# Altium PCB PCB.PcbDoc (part 1 of 2)
Units mm, origin at the board's own origin, x right, y up, seen from the top; angles counter-clockwise.
Board outline 183.5 x 159 mm, 2 copper layers (Top Layer, Bottom Layer); 206 components, 135 nets, 566 pads, 103 vias.
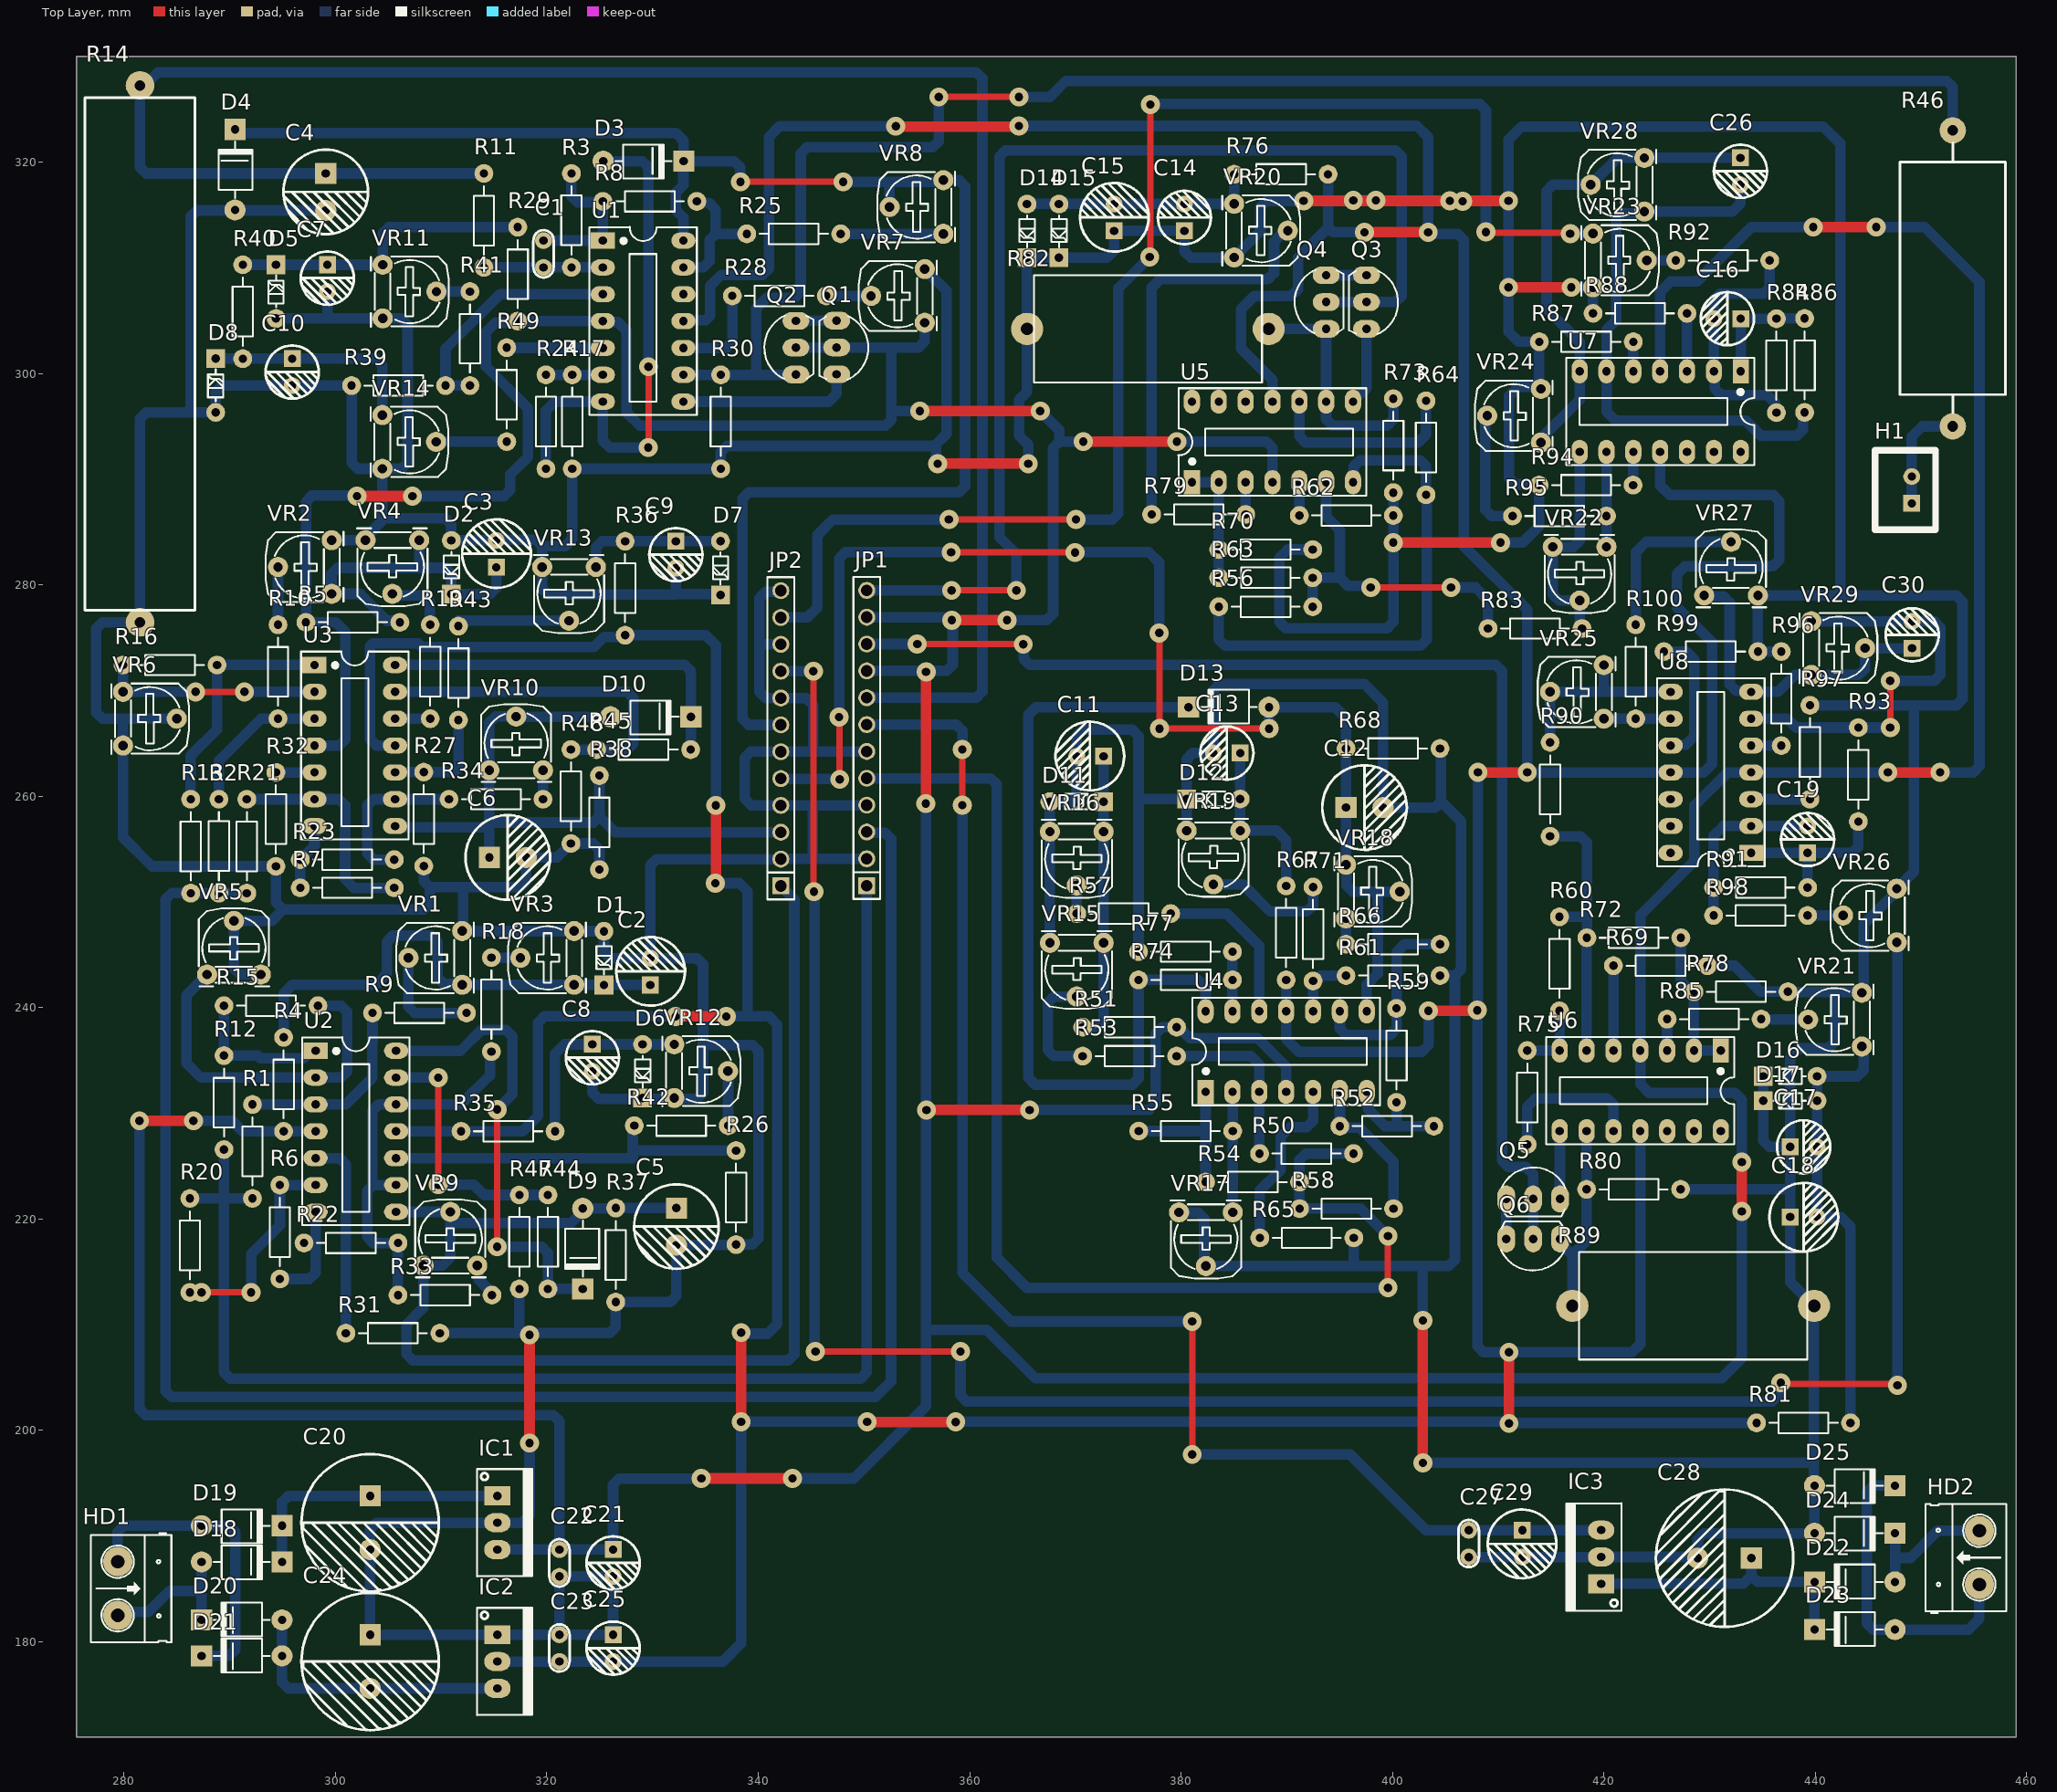
[diagram p0: Top Layer view]
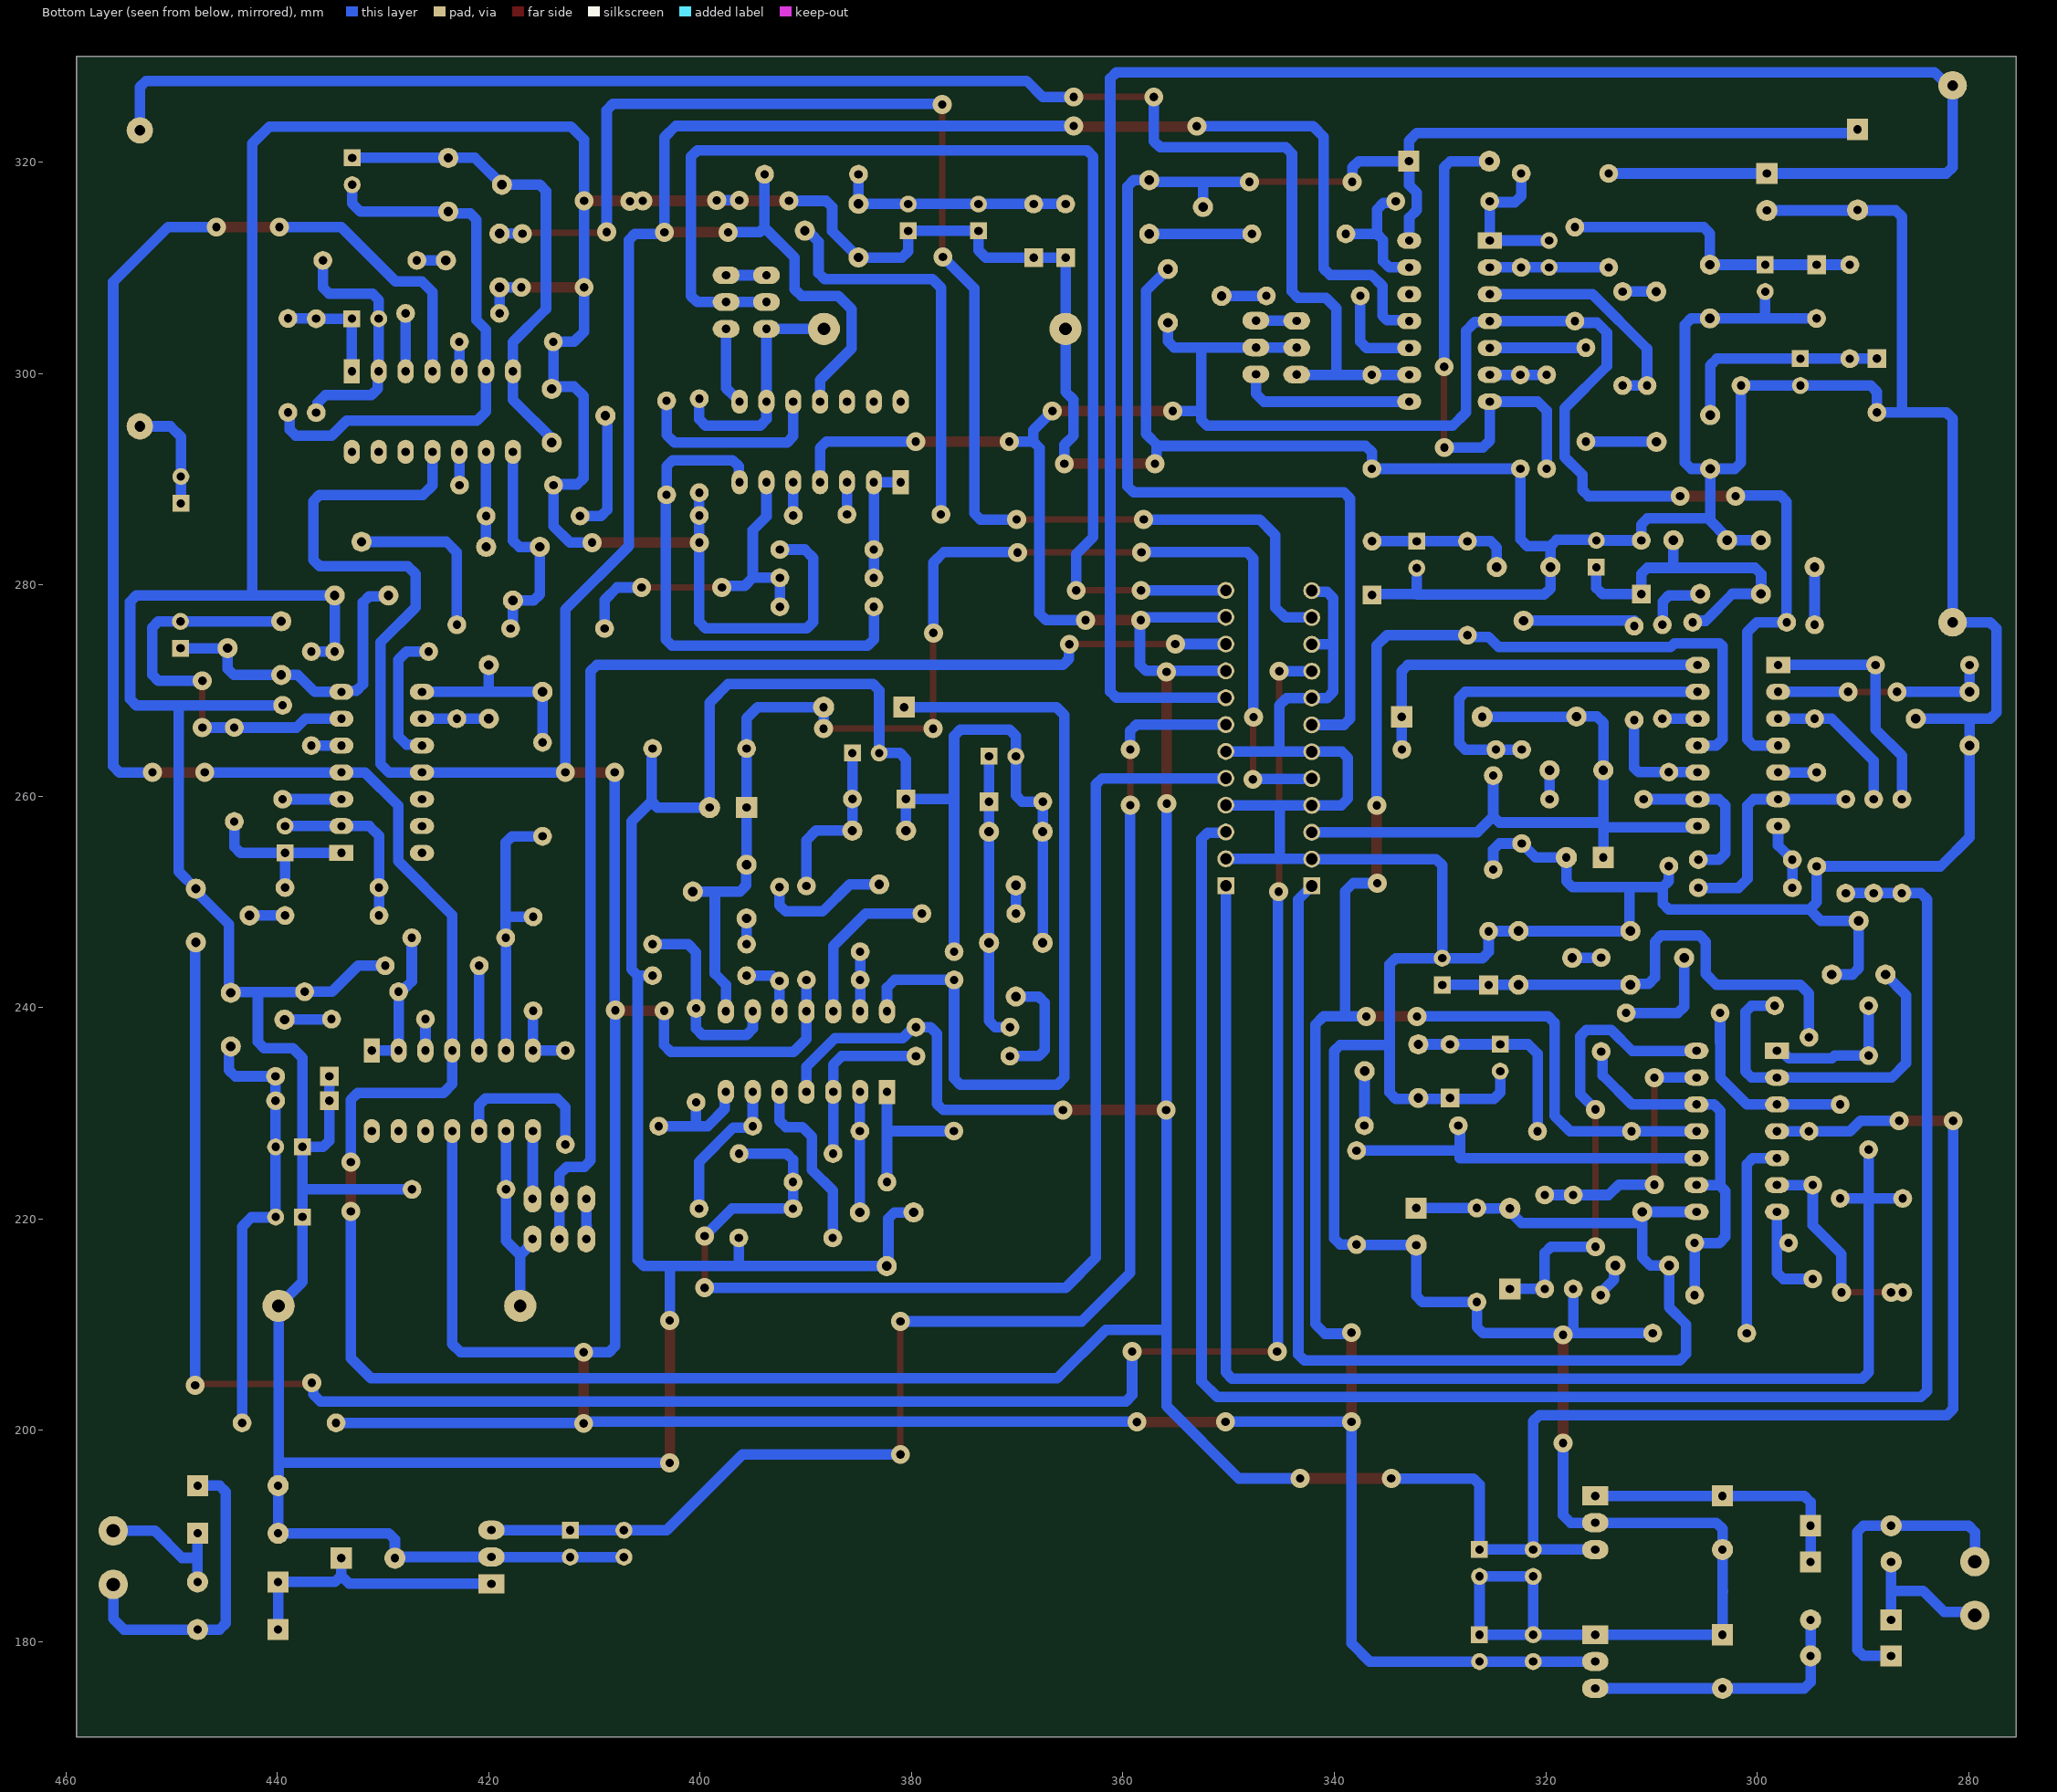
[diagram p1: Bottom Layer view, seen from below]
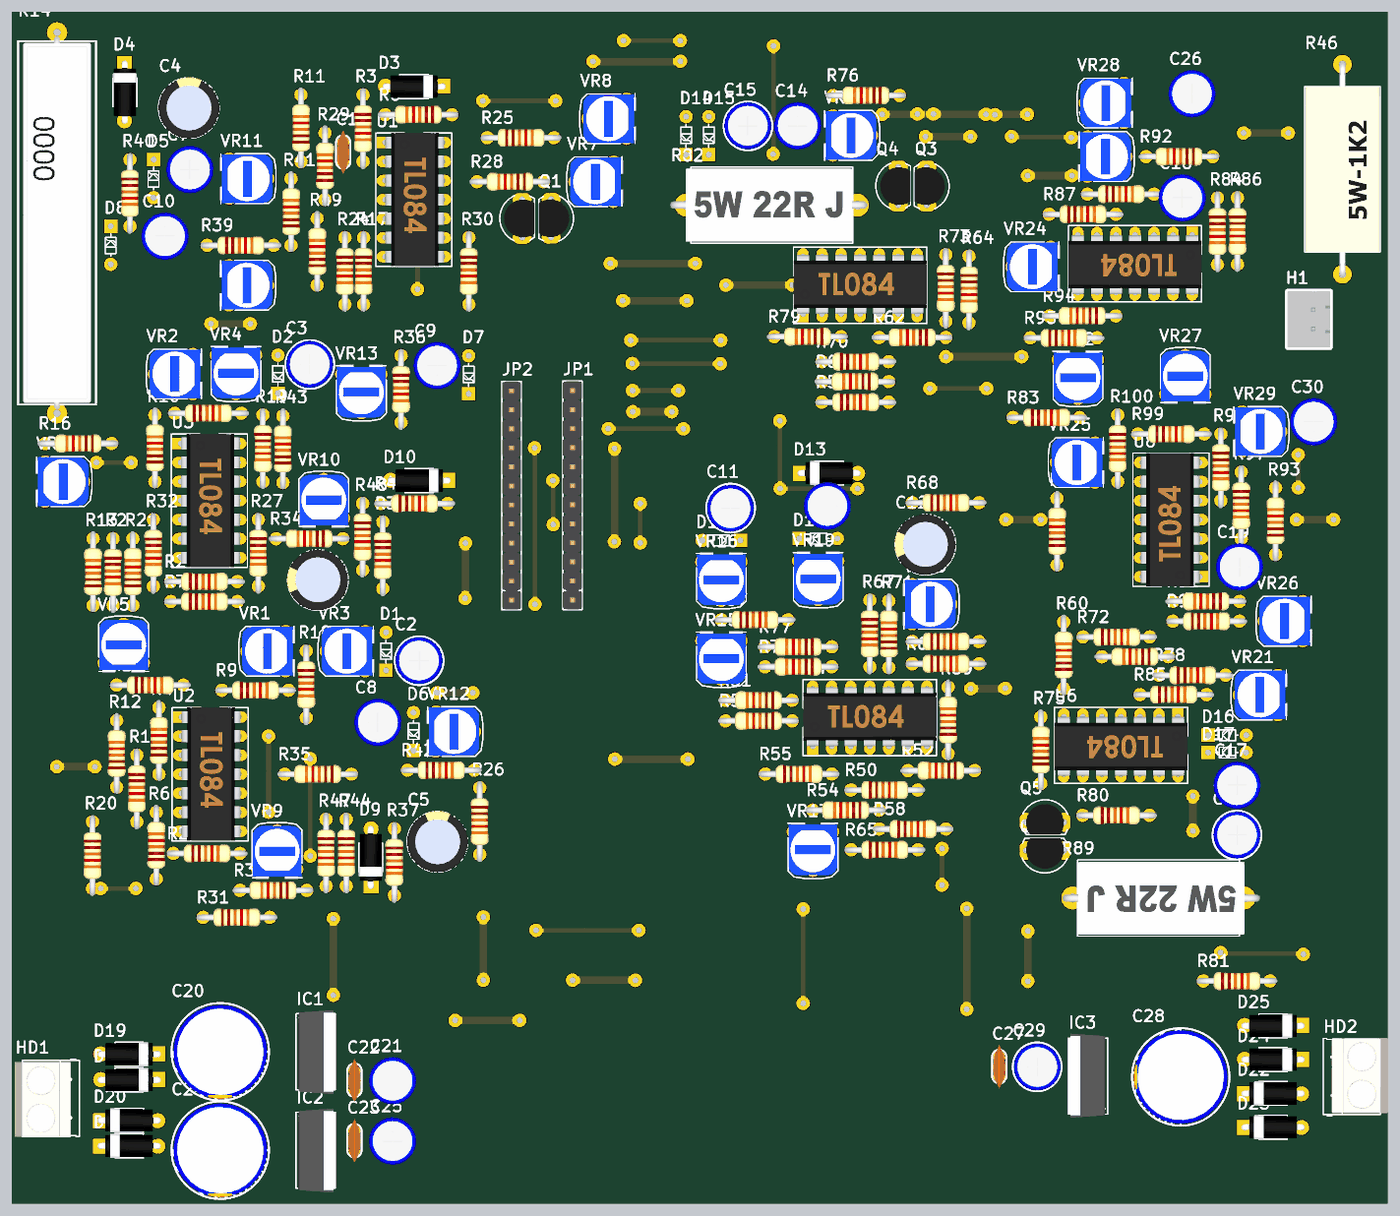
[diagram p3: 3D render of the assembled board from above, using the file's embedded part models]

## Layer stack, top to bottom
Top Solder: solder mask 0.0102, Solder Resist, Dk 3.5
Top Layer: signal copper 0.0356
Dielectric 1: dielectric 0.32, FR-4, Dk 4.8
Bottom Layer: signal copper 0.0356
Bottom Solder: solder mask 0.0102, Solder Resist, Dk 3.5

## Board outline
275.5,171 275.5,330 459,330 459,171

## Design rules (kind name [scope] priority, off if disabled: settings)
Clearance [All] p1: gap=0.6 ignorepadtopadclearanceinfootprint=FALSE
PolygonConnect [All] p1: connectstyle=Relief reliefconductorwidth=0.254 reliefentries=4 polygonreliefangle="90 Angle" airgapwidth=0.254
RoutingVias [All] p1: holewidth=0.711 width=1.27 viastyle="Through Hole" minholewidth=0.711 minwidth=1.27 maxholewidth=0.711 maxwidth=1.27
SolderMaskExpansion [All] p1: expansion=0.102 istentingtop=FALSE
Width GND [InNet('GND')] p1: maxlimit=1 minlimit=1 preferedwidth=1 minimp=50.000000 maximp=50.000000 favimp=50.000000
Width +12 [InNet('+12V')] p2: maxlimit=1 minlimit=1 preferedwidth=1 minimp=50.000000 maximp=50.000000 favimp=50.000000
Width -12 [InNet('-12V')] p3: maxlimit=1 minlimit=1 preferedwidth=1 minimp=50.000000 maximp=50.000000 favimp=50.000000
Width S [All] p4: maxlimit=1 minlimit=0.6 preferedwidth=0.8 toplayer_maxwidth=0.6 toplayer_prefwidth=0.6 minimp=50.000000 maximp=50.000000 favimp=50.000000
30 further rules are at their usual default settings.

## Components (designator, comment, footprint, x,y, rotation, side; value= is the part's Value field where it differs from the comment)
C1 "105" "tu gom" 319.685,311.301 r270 top
C2 "47uF/50V" "tu hoa 6.5mm" 329.82,243.433 r90 top
C3 "47uF/50V" "tu hoa 6.5mm" 315.24,282.955 r90 top
C4 "220uF/25V" "Tu hoa 8mm" 299.086,317.171 r270 top
C5 "100uF/50V" "tu hoa 8mm" 332.258,219.28 r270 top
C6 "100uF/50V" "tu hoa 8mm" 316.305,254.202 r0 top
C7 "100uF/25V" "tu hoa 5mm" 299.238,309.015 r270 top
C8 "100uF/25V" "tu hoa 5mm" 324.308,235.254 r270 top
C9 "100uF/25V" "tu hoa 5mm" 332.208,282.853 r270 top
C10 "47uF" "tu hoa 5mm" 295.911,300.125 r270 top
C11 "47uF/50V" "tu hoa 6.5mm" 371.374,263.803 r180 top
C12 "100uF/50V" "tu hoa 8mm" 397.356,258.927 r0 top
C13 "100uF/25V" "tu hoa 5mm" 384.328,264.083 r180 top
C14 "100uF/25V" "tu hoa 5mm" 380.315,314.756 r90 top
C15 "47uF/50V" "tu hoa 6.5mm" 373.686,314.781 r90 top
C16 "100uF/25V" "tu hoa 5mm" 431.674,305.18 r180 top
C17 "100uF/25V" "tu hoa 5mm" 438.888,226.819 r0 top
C18 "47uF/50V" "tu hoa 6.5mm" 438.913,220.165 r0 top
C19 "100uF/25V" "tu hoa 5mm" 439.269,255.902 r90 top
C20 "1000uF/25v" "tu hoa 13mm" 303.281,191.258 r270 top
C21 "100uF" "tu hoa 5mm" 326.268,187.448 r270 top
C22 "104" "tu gom" 321.188,187.448 r270 top
C23 "104" "tu gom" 321.188,179.397 r270 top
C24 "1000uF/25v" "tu hoa 13mm" 303.281,178.127 r270 top
C25 "100uF" "tu hoa 5mm" 326.268,179.397 r270 top
C26 "100uF/25V" "tu hoa 5mm" 432.919,319.125 r270 top
C27 "104" "tu gom" 407.208,189.282 r270 top
C28 "1000uF/35V" "tu hoa 13mm" 431.415,187.91 r180 top
C29 "100uF" "tu hoa 6.5mm" 412.263,189.256 r270 top
C30 "100uF/25V" "tu hoa 5mm" 449.162,275.27 r90 top
D1 "5V1" DZ0.5A 325.4,247.217 r90 top value=3v3
D2 "5V1" DZ0.5A 310.973,284.2 r90 top value=3v3
D3 "4007" "DIODE 1A" 324.058,320.085 r180 top
D4 "4007" "DIODE 1A" 290.501,314.197 r270 top
D5 "6V8" DZ0.5A 294.387,305.205 r270 top value=3v3
D6 "5V1" DZ0.5A 329.058,236.524 r90 top value=3v3
D7 "5V1" DZ0.5A 336.424,284.123 r90 top value=3v3
D8 "2V3" DZ0.5A 288.672,296.315 r270 top value=3v3
D9 "4007" "DIODE 1A" 323.398,222.269 r90 top
D10 "4007" "DIODE 1A" 324.74,267.512 r180 top
D11 "5V1" DZ0.5A 367.59,259.485 r180 top value=3v3
D12 "5V1" DZ0.5A 385.598,259.739 r0 top value=3v3
D13 "4007" "DIODE 1A" 389.586,268.426 r0 top
D14 "6V8" DZ0.5A 365.431,316.026 r90 top value=3v3
D15 "2V3" DZ0.5A 368.453,316.026 r90 top value=3v3
D16 "6V8" DZ0.5A 440.158,233.5 r0 top value=3v3
D17 "2V3" DZ0.5A 440.158,231.188 r0 top value=3v3
D18 "4007" "DIODE 1A" 286.059,187.55 r180 top
D19 "4007" "DIODE 1A" 286.059,190.979 r180 top
D20 "4007" "DIODE 1A" 296.219,182.064 r0 top
D21 "4007" "DIODE 1A" 296.219,178.66 r0 top
D22 "4007" "DIODE 1A" 448.814,185.658 r0 top
D23 "4007" "DIODE 1A" 448.814,181.154 r0 top
D24 "4007" "DIODE 1A" 438.654,190.264 r180 top
D25 "4007" "DIODE 1A" 438.654,194.768 r180 top
H1 "Header 2P 2.54 Duc Thang" XH2.54M-2 449.124,287.705 r90 top
HD1 "Header 2" HED2 279.405,187.575 r270 top
HD2 "Header 2" HED2 455.519,185.421 r90 top
IC1 "LM7812" QTO-220 315.32,193.798 r270 top value=LM7805
IC2 "LM7912" QTO-220 315.32,180.667 r270 top value=LM7905
IC3 "LM7824" QTO-220 419.743,185.484 r90 top value=LM7805
JP1 "Noi TB1" JP12-D1T 350.267,251.535 r90 top
JP2 "Noi VXL1" JP12-D1T 342.139,251.51 r90 top
Q1 "C1815" QTO-92 347.422,302.462 r270 top
Q2 "C2335" QTO-92 343.561,302.437 r90 top value=C1815
Q3 "C1815" QTO-92 397.536,306.755 r270 top
Q4 "C2323" QTO-92 393.726,306.755 r90 top value=C1815
Q5 "C1815" QTO-92 413.31,221.893 r0 top
Q6 "C2323" QTO-92 413.31,218.109 r180 top value=C1815
R1 "10.17K" R1/4W 292.152,221.944 r90 top value="R1/4W - 1K"
R2 "10.17K" R1/4W 288.977,250.824 r90 top value="R1/4W - 1K"
R3 "22k" R1/4W 322.327,310.031 r90 top value="R1/4W - 1K"
R4 "680" R1/4W 295.098,237.184 r270 top value="R1/4W - 1K"
R5 "680" R1/4W 306.096,276.453 r180 top value="R1/4W - 1K"
R6 "100K" R1/4W 294.743,223.214 r270 top value="R1/4W - 1K"
R7 "100K" R1/4W 305.563,251.332 r180 top value="R1/4W - 1K"
R8 "4.7k" R1/4W 325.299,316.28 r0 top value="R1/4W - 1K"
R9 "10.17K" R1/4W 312.396,239.496 r180 top value="R1/4W - 1K"
R10 "10.17K" R1/4W 294.565,276.224 r270 top value="R1/4W - 1K"
R11 "22k" R1/4W 314.047,318.921 r270 top value="R1/4W - 1K"
R12 "2k7" R1/4W 289.459,235.457 r270 top value="R1/4W - 1K"
R13 "2k7" R1/4W 286.31,259.714 r270 top value="R1/4W - 1K"
R14 "68" "Tro cong suat 10W" 281.509,301.853 r90 top
R15 "10.17K" R1/4W 298.349,240.181 r180 top value="R1/4W - 1K"
R16 "10.17K" R1/4W 279.909,272.414 r0 top value="R1/4W - 1K"
R17 "3.3k" R1/4W 322.403,290.981 r90 top value="R1/4W - 1K"
R18 "10k" R1/4W 314.758,235.838 r90 top value="R1/4W - 1K"
R19 "10k" R1/4W 308.967,267.334 r90 top value="R1/4W - 1K"
R20 "10K" R1/4W 286.234,213.054 r90 top value="R1/4W - 1K"
R21 "10K" R1/4W 291.618,259.714 r270 top value="R1/4W - 1K"
R22 "10K" R1/4W 305.919,217.728 r180 top value="R1/4W - 1K"
R23 "10K" R1/4W 305.563,253.999 r180 top value="R1/4W - 1K"
R24 "10k" R1/4W 319.914,290.981 r90 top value="R1/4W - 1K"
R25 "47k" R1/4W 347.803,313.206 r180 top value="R1/4W - 1K"
R26 "8.2k" R1/4W 337.897,217.575 r90 top value="R1/4W - 1K"
R27 "8.2k" R1/4W 308.357,253.389 r90 top value="R1/4W - 1K"
R28 "100k" R1/4W 337.542,307.339 r0 top value="R1/4W - 1K"
R29 "390" R1/4W 317.247,313.841 r270 top value="R1/4W - 1K"
R30 "100k" R1/4W 336.449,290.981 r90 top value="R1/4W - 1K"
R31 "10K" R1/4W 309.881,209.193 r180 top value="R1/4W - 1K"
R32 "10K" R1/4W 294.362,253.364 r90 top value="R1/4W - 1K"
R33 "100K" R1/4W 305.919,212.8 r0 top value="R1/4W - 1K"
R34 "100K" R1/4W 310.745,259.714 r0 top value="R1/4W - 1K"
R35 "680" R1/4W 311.888,228.294 r0 top value="R1/4W - 1K"
R36 "680" R1/4W 327.407,275.233 r90 top value="R1/4W - 1K"
R37 "100K" R1/4W 326.518,212.14 r90 top value="R1/4W - 1K"
R38 "100K" R1/4W 324.969,253.059 r90 top value="R1/4W - 1K"
R39 "10k" R1/4W 310.414,298.855 r180 top value="R1/4W - 1K"
R40 "680" R1/4W 291.237,301.395 r90 top value="R1/4W - 1K"
R41 "6.8k" R1/4W 312.726,307.745 r270 top value="R1/4W - 1K"
R42 "10k" R1/4W 337.161,228.828 r180 top value="R1/4W - 1K"
R43 "10k" R1/4W 311.634,276.097 r270 top value="R1/4W - 1K"
R44 "10k" R1/4W 320.096,213.379 r90 top value="R1/4W - 1K"
R45 "10k" R1/4W 333.605,264.413 r180 top value="R1/4W - 1K"
R46 "220" "Tro cong suat 5W" 453,309 r90 top
R47 "3.3k" R1/4W 317.404,213.379 r90 top value="R1/4W - 1K"
R48 "3.3k" R1/4W 322.276,255.523 r90 top value="R1/4W - 1K"
R49 "10k" R1/4W 316.206,302.437 r270 top value="R1/4W - 1K"
R50 "10.17K" R1/4W 396.317,226.186 r180 top value="R1/4W - 1K"
R51 "680" R1/4W 370.689,238.149 r0 top value="R1/4W - 1K"
R52 "100K" R1/4W 395.022,228.777 r0 top value="R1/4W - 1K"
R53 "10.17K" R1/4W 370.689,235.406 r0 top value="R1/4W - 1K"
R54 "2k7" R1/4W 382.322,223.494 r0 top value="R1/4W - 1K"
R55 "10.17K" R1/4W 384.887,228.32 r180 top value="R1/4W - 1K"
R56 "10K" R1/4W 392.456,277.926 r180 top value="R1/4W - 1K"
R57 "10k" R1/4W 379.02,248.894 r180 top value="R1/4W - 1K"
R58 "10K" R1/4W 400.102,220.979 r180 top value="R1/4W - 1K"
R59 "10K" R1/4W 400.381,239.927 r270 top value="R1/4W - 1K"
R60 "10K" R1/4W 415.799,248.589 r270 top value="R1/4W - 1K"
R61 "8.2k" R1/4W 404.496,243.026 r180 top value="R1/4W - 1K"
R62 "4.7K" R1/4W 391.186,286.562 r0 top value="R1/4W - 1K"
R63 "100K" R1/4W 383.566,280.669 r0 top value="R1/4W - 1K"
R64 "10K" R1/4W 403.175,288.518 r90 top value="R1/4W - 1K"
R65 "10K" R1/4W 396.343,218.21 r180 top value="R1/4W - 1K"
R66 "100K" R1/4W 404.496,245.998 r180 top value="R1/4W - 1K"
R67 "680" R1/4W 389.942,242.62 r90 top value="R1/4W - 1K"
R68 "100K" R1/4W 404.496,264.515 r180 top value="R1/4W - 1K"
R69 "4.7K" R1/4W 420.904,243.964 r0 top value="R1/4W - 1K"
R70 "100K" R1/4W 392.456,283.336 r180 top value="R1/4W - 1K"
R71 "10k" R1/4W 392.482,251.408 r270 top value="R1/4W - 1K"
R72 "100K" R1/4W 427.28,246.606 r180 top value="R1/4W - 1K"
R73 "100K" R1/4W 400.076,288.721 r90 top value="R1/4W - 1K"
R74 "10k" R1/4W 375.972,242.62 r0 top value="R1/4W - 1K"
R75 "10K" R1/4W 412.751,235.94 r270 top value="R1/4W - 1K"
R76 "390" R1/4W 385.014,318.845 r0 top value="R1/4W - 1K"
R77 "3.3k" R1/4W 375.972,245.287 r0 top value="R1/4W - 1K"
R78 "100K" R1/4W 437.414,241.501 r180 top value="R1/4W - 1K"
R79 "10K" R1/4W 377.216,286.663 r0 top value="R1/4W - 1K"
R80 "100K" R1/4W 427.254,222.806 r180 top value="R1/4W - 1K"
R81 "390" R1/4W 443.333,200.71 r180 top value="R1/4W - 1K"
R82 "R5W -224" R5W 365.431,304.215 r0 top value="R5W - 0,47R"
R83 "10k" R1/4W 417.933,275.868 r180 top value="R1/4W - 1K"
R84 "10k" R1/4W 436.322,296.29 r90 top value="R1/4W - 1K"
R85 "10K" R1/4W 434.874,238.91 r180 top value="R1/4W - 1K"
R86 "10k" R1/4W 438.989,296.315 r90 top value="R1/4W - 1K"
R87 "4.7K" R1/4W 422.784,302.996 r180 top value="R1/4W - 1K"
R88 "4.7K" R1/4W 427.864,305.688 r180 top value="R1/4W - 1K"
R89 "R5W -224" R5W 439.878,211.783 r180 top value="R5W - 0,47R"
R90 "10k" R1/4W 414.91,265.097 r270 top value="R1/4W - 1K"
R91 "10k" R1/4W 430.379,251.356 r0 top value="R1/4W - 1K"
R92 "10k" R1/4W 426.797,310.692 r0 top value="R1/4W - 1K"
R93 "10k" R1/4W 444.069,266.494 r270 top value="R1/4W - 1K"
R94 "6.8k" R1/4W 413.869,289.432 r0 top value="R1/4W - 1K"
R95 "10k" R1/4W 420.244,286.511 r180 top value="R1/4W - 1K"
R96 "4.7K" R1/4W 436.779,264.792 r90 top value="R1/4W - 1K"
R97 "4.7K" R1/4W 439.497,259.712 r90 top value="R1/4W - 1K"
R98 "10k" R1/4W 439.269,248.714 r180 top value="R1/4W - 1K"
R99 "6.8k" R1/4W 434.57,273.682 r180 top value="R1/4W - 1K"
R100 "10k" R1/4W 423.013,267.332 r90 top value="R1/4W - 1K"
U1 "TL084" TL084 329.109,304.951 r270 top
U2 "TL084" TL084 301.931,228.294 r270 top
U3 "TL084" TL084 301.829,264.794 r270 top
U4 "TL084" TL084 389.942,235.838 r0 top
U5 "TL084" TL084 388.646,293.521 r0 top
U6 "TL084" TL084 423.444,232.128 r180 top
U7 "TL084" TL084 425.324,296.392 r180 top
U8 "TL084" TL084 430.125,262.252 r90 top
VR1 "10K" "Bien tro tam giac-DIP nam" 309.449,244.703 r90 top
VR2 "10K" "Bien tro tam giac-DIP nam" 297.105,281.685 r90 top
VR3 "10K" "Bien tro tam giac-DIP nam" 320.041,244.703 r90 top
VR4 "10K" "Bien tro tam giac-DIP nam" 305.385,281.685 r180 top
VR5 "10K" "Bien tro tam giac-DIP nam" 290.399,245.668 r0 top
VR6 "10K" "Bien tro tam giac-DIP nam" 282.449,267.334 r270 top
VR7 "2K" "Bien tro tam giac-DIP nam" 353.213,307.339 r90 top
VR8 "100K" "Bien tro tam giac-DIP nam" 354.966,315.746 r90 top
VR9 "100K" "Bien tro tam giac-DIP nam" 310.872,218.134 r0 top
VR10 "100K" "Bien tro tam giac-DIP nam" 317.095,264.997 r0 top
VR11 "2K" "Bien tro tam giac-DIP nam" 307.011,307.745 r270 top
VR12 "100K" "Bien tro tam giac-DIP nam" 334.595,233.984 r270 top
VR13 "100K" "Bien tro tam giac-DIP nam" 322.098,279.145 r180 top
VR14 "2K" "Bien tro tam giac-DIP nam" 306.985,293.521 r270 top
VR15 "10K" "Bien tro tam giac-DIP nam" 370.13,243.585 r180 top
VR16 "10K" "Bien tro tam giac-DIP nam" 370.13,254.101 r180 top
VR17 "10K" "Bien tro tam giac-DIP nam" 382.347,218.083 r180 top
VR18 "100K" "Bien tro tam giac-DIP nam" 398.146,250.976 r270 top
VR19 "100K" "Bien tro tam giac-DIP nam" 383.058,254.202 r180 top
VR20 "2K" "Bien tro tam giac-DIP nam" 387.554,313.511 r270 top
VR21 "2K" "Bien tro tam giac-DIP nam" 441.859,238.859 r90 top
VR22 "20K" "Bien tro tam giac-DIP nam" 417.704,281.05 r180 top
VR23 "2K" "Bien tro tam giac-DIP nam" 421.514,310.692 r270 top
VR24 "5K" "Bien tro tam giac-DIP nam" 411.5,296 r90 top
VR25 "20K" "Bien tro tam giac-DIP nam" 417.45,269.872 r90 top
VR26 "2K" "Bien tro tam giac-DIP nam" 445.161,248.714 r90 top
VR27 "5K" "Bien tro tam giac-DIP nam" 432.03,281.531 r0 top
VR28 "10K" "Bien tro tam giac-DIP nam" 421.285,317.855 r90 top
VR29 "10K" "Bien tro tam giac-DIP nam" 442.164,274.013 r270 top

## Footprints (in the part's own frame and the unit in brackets; to place one, negate y for a bottom-side part, rotate by r counter-clockwise, add the part's x,y. Pads: shape width x height; smd on the part's side, far side on the other; paste and mask are expansions set on the pad)
"Bien tro tam giac-DIP nam" [mil]
  round 75 hole 35: 1(-100,-100) 2(0,100) 3(100,-100)
  silkscreen extent -131,-144 131,146, body extent -128,-150 128,128, height 279
"DIODE 1A" [mm] "Diode 1A"
  round 2 hole 0.8: 1(-1.27,0)
  rect 2x2 hole 0.8: 2(-8.89,0)
  silkscreen extent -7.75,-1.55 -2.41,1.65, body extent -9.29,-1.55 -0.87,1.65, height 3.1
DZ0.5A [mil]
  round 70 hole 32: 1(0,0)
  rect 70x70 hole 32: 2(-200,0)
  silkscreen extent -161,-29 -42,28
HED2 [mil] "Header 2, 2 pin, hight 300mil, Pin to Pin 200, Colour Green"
  round 110 hole 50: 1(0,0) 2(200,0)
  silkscreen extent -106,-100 300,200, body extent -92,-140 302,155, height 394
JP12-D1T [mm] "12 pins, 1 row, straight, gold plating"
  rect 1.6x1.6 hole 1.1: 1(0,0)
  round 1.6 hole 1.1: 2(2.54,0) 3(5.08,0) 4(7.62,0) 5(10.16,0) 6(12.7,0) 7(15.24,0) 8(17.78,0) 9(20.32,0) 10(22.86,0) 11(25.4,0) 12(27.94,0)
  silkscreen extent -1.27,-1.27 29.21,1.27, body extent -1.27,-1.27 29.21,1.27, height 8.54
QTO-92 [mil] "TO-92"
  oval 66x100 hole 32: 1(-100,0) 2(0,0) 3(100,0)
  silkscreen extent -117,-65 120,118, body extent -109,-66 109,95, height 245
QTO-220 [mm] "TO-220 - 1-2-3"
  rect 1.8x2.5 hole 0.8: 1(0,0)
  oval 1.8x2.5 hole 0.8: 2(2.54,0) 3(5.08,0)
  silkscreen extent -2.54,-1.93 7.62,3.3, body extent -3.02,-1.63 8.19,3.06, height 19.17
R1/4W [mil] "R 1/4W, 2 Pin, 350mil"
  round 70 hole 31.5: 1(0,0) 2(350,0)
  silkscreen extent 48,-38 302,38, body extent -40,-47 386,47, height 111
R5W [mil] "R5W , 2 pin, 400 x 950mil"
  round 120 hole 47.24: 1(0,0) 2(900,0)
  silkscreen extent 25,-200 875,200, body extent -85,-190 955,192, height 363
TL084 [mil]
  rect 60x90 hole 31.5: 1(-300,-150)
  oval 60x90 hole 31.5: 2(-200,-150) 3(-100,-150) 4(0,-150) 5(100,-150) 6(200,-150) 7(300,-150) 8(300,150) 9(200,150) 10(100,150) 11(0,150) 12(-100,150) 13(-200,150) 14(-300,150)
  silkscreen extent -350,-200 350,200, body extent -350,-150 350,160, height 209
"Tro cong suat 5W" [mm]
  round 2.5 hole 1: 1(-14,0) 2(14,0)
  silkscreen extent -12.7,-5 12.83,5, body extent -14.34,-5 14.35,5, height 9
"Tro cong suat 10W" [mm]
  round 2.7 hole 1: 1(-25.4,0) 2(25.4,0)
  silkscreen extent -24.25,-5.2 24.25,5.2, body extent -24.9,-4.5 24.9,4.5, height 10.55
"tu gom" [mm] "Tu gom mini"
  round 1.6 hole 0.8: 1(-1.27,0) 2(1.27,0)
  silkscreen extent -2.25,-0.97 2.22,0.97, body extent -2.92,-0.85 2.92,0.85, height 6.12
"tu hoa 5mm" [mm]
  rect 1.6x1.6 hole 0.8: 1(-1.27,0)
  round 1.6 hole 0.8: 2(1.27,0)
  silkscreen extent -2.51,-2.51 2.51,2.51, body extent -3.12,-3.18 3.23,3.18, height 14.55
"tu hoa 6.5mm" [mm]
  rect 1.6x1.6 hole 0.8: 1(-1.295,0.025)
  round 1.6 hole 0.8: 2(1.245,0.025)
  silkscreen extent -3.25,-3.25 3.25,3.25, body extent -3.15,-3.15 3.2,3.2, height 14.55
"Tu hoa 8mm" [mm]
  rect 2x2 hole 0.8: 1(-1.75,0)
  round 2 hole 0.8: 2(1.75,0)
  silkscreen extent -4,-4 4,4, body extent -4.1,-4.07 4.1,4.13, height 13.81
"tu hoa 8mm" [mm]
  rect 2x2 hole 0.8: 1(-1.75,0)
  round 2 hole 0.8: 2(1.75,0)
  silkscreen extent -4,-4 4,4, body extent -4.1,-4.07 4.1,4.13, height 13.81
"tu hoa 13mm" [mm]
  rect 2x2 hole 0.8: 1(-2.54,0)
  round 2 hole 0.8: 2(2.54,0)
  silkscreen extent -6.5,-6.5 6.5,6.5, body extent -6.25,-6.25 6.26,6.25, height 23.02
XH2.54M-2 [mm]
  rect 1.6x1.6 hole 0.8: 1(0,0)
  round 1.6 hole 0.8: 2(2.54,0)
  silkscreen extent -2.48,-2.26 5.02,3.46, body extent -2.48,-2.26 5.02,3.48, height 6.91

## Part data
C1 C22 C23 C27: library part "Tu gom 104 50V", "Cắm", Chung_Loai=Cắm, Don_Vi=Con, Ma_Hang=MH004761, So_Chan=2, Ten_Linh_Kien="Tụ gốm 104 100nF 50V"
C2 C3 C11 C15 C18: library part "Tu Hoa 47uF 50V 6x11", "Cắm", Chung_Loai=Cắm, Don_Vi=Con, Ma_Hang=MH001360, So_Chan=2, Ten_Linh_Kien="Tụ Hóa 47uF 50V"
C4: library part "Tu Hoa 220uF 25V 8x10", "Cắm", Chung_Loai=Cắm, Don_Vi=Con, Ma_Hang=MH006864, So_Chan=2, Ten_Linh_Kien="Tụ Hóa 220uF 25V 8x10MM"
C5 C6 C12: library part "Tu Hoa 100uF 50V 8x11", "Cắm", Chung_Loai=Cắm, Don_Vi=Con, Ma_Hang=MH006872, So_Chan=2, Ten_Linh_Kien="Tụ Hóa 100uF 50V 8x11MM"
C7 C8 C9 C13 C14 C16 C17 C19 C21 C25 C26 C30: library part "Tu Hoa 100uF 25V 6x11", "Cắm", Chung_Loai=Cắm, Don_Vi=Con, Ma_Hang=MH001351, So_Chan=2, Ten_Linh_Kien="Tụ Hóa 100uF 25V 6x11MM"
C10: library part "Tu Hoa 47uF 25V 5x8", "Cắm", Chung_Loai=Cắm, Don_Vi=Con, Ma_Hang=MH006860, So_Chan=2, Ten_Linh_Kien="Tụ Hóa 47uF 25V"
C20 C24 C28: library part "Tu Hoa 1000uF 25V 13x21", "Cắm", Chung_Loai=Cắm, Don_Vi=Con, Ma_Hang=MH002315, So_Chan=2, Ten_Linh_Kien="Tụ Hóa 1000uF 25V 13x21MM"
C29: library part "Tu Hoa 100uF 35V 6x8", "Cắm", Chung_Loai=Cắm, Don_Vi=Con, Ma_Hang=MH006862, So_Chan=2, Ten_Linh_Kien="Tụ Hóa 100uF 35V"
D1 D2 D5 D6 D7 D8 D11 D12 D14 D15 D16 D17: library part DZ, "Diode Zenner"
D3 D4 D9 D10 D13 D18 D19 D20 D21 D22 D23 D24 D25: library part "Diode 1N4007", "Cắm", Chung_Loai=Cắm, Don_Vi=Con, Ma_Hang=MH001063, Ten_Linh_Kien="Diode 1N4007 1A (DIP)"
H1: "Cắm", Chung_Loai=Cắm, Don_Vi=Con, Ma_Hang=MH001283, Ten_Linh_Kien="Header 2P XH2.54-2P Đực Thẳng"
HD1 HD2: library part Hed2, "Header 2 (Green)"
IC1 IC3: library part LM78xx, "On ap +, from + 5 to + 24VDC"
IC2: library part LM79xx, "On ap -, from - 5 to - 24VDC"
JP1 JP2: library part JP12, "WR-PHD 2.54 mm Angled Socket Header", Manufacturer="W¨¹rth Elektronik eiSos GmbH", partNo=613012143121, ComponentLink1 Description=Manufacturer, ComponentLink1URL=http://www.we-online.com, ComponentLink2 Description=Datasheet, ComponentLink2URL=http://katalog.we-online.de/em/datasheet/6130xx143121.pdf, Created by="Karrer Zheng", Created Date="29 March 2013", NoPins=12
Q1 Q3 Q5: "NPN 600mW, ECB"
Q2 Q4 Q6: library part C1815, "NPN 600mW, ECB"
R1 R2 R3 R4 R5 R6 R7 R8 R9 R10 R11 R12 R13 R15 R16 R17 R18 R19 R20 R21 R22 R23 R24 R25 R26 R27 R28 R29 R30 R31 R32 R33 R34 R35 R36 R37 R38 R39 R40 R41 R42 R43 R44 R45 R47 R48 R49 R50 R51 R52 R53 R54 R55 R56 R57 R58 R59 R60 R61 R62 R63 R64 R65 R66 R67 R68 R69 R70 R71 R72 R73 R74 R75 R76 R77 R78 R79 R80 R81 R83 R84 R85 R86 R87 R88 R90 R91 R92 R93 R94 R95 R96 R97 R98 R99 R100: library part R1/4W, "Resistor 1/4W"
R14: library part "Tro cong suat 10W"
R46: library part "Tro cong suat 5W"
R82 R89: library part R5W, "Resistor 5W"
VR1 VR2 VR3 VR4 VR5 VR6 VR7 VR8 VR9 VR10 VR11 VR12 VR13 VR14 VR15 VR16 VR17 VR18 VR19 VR20 VR21 VR22 VR23 VR24 VR25 VR26 VR27 VR28 VR29: library part "Bien tro tam giac nam"

## Via types
v1: diameter 1.8, hole 0.8, Top Layer to Bottom Layer, 103 vias

## Nets (pads, with @x,y where several pads share a name; then routed paths per layer and width w, separated by ;. In a path a pad name is that pad's centre, name@x,y a point inside that pad or via, vN(x,y) a via of type N, cw(c..) or ccw(c..) an arc to the next point about the centre after c; other vN are vias at no path point)
2: C1.2 R3.1 R11.2 U1.2 | length 11.3
  Bottom Layer w1: R11.2@314.047,310.031 C1.2@319.685,310.031 R3.1@322.327,310.031 U1.2@325.299,310.031
3: R39.1 R41.2 U1.3 | length 22.8
  Bottom Layer w1: R41.2@312.726,298.855 R39.1@310.414,298.855 310.414,302.337 315.568,307.491 U1.3@325.299,307.491
5: R49.1 U1.5 | length 9.1
  Bottom Layer w1: R49.1@316.206,302.437 316.218,302.424 325.286,302.424 U1.5@325.299,302.411
6: R17.2 R24.2 U1.6 | length 5.4
  Bottom Layer w1: R24.2@319.914,299.871 R17.2@322.403,299.871 U1.6@325.299,299.871
8: Q1.3 U1.8 | length 16.6
  Bottom Layer w1: U1.8@332.919,297.331 346.66,297.331 347.422,298.093 Q1.3@347.422,299.922
9: Q2.1 R30.2 R46.2 U1.9 | length 153.5
  Top Layer w0.6: v1(357.074,326.16) v1(364.654,326.16)
  Bottom Layer w1: U1.9@332.919,299.871 R30.2@336.449,299.871 339.802,299.871 ; Q2.1@343.561,299.897 343.536,299.871 339.802,299.871 ; v1(357.074,326.16) 357.074,321.978 356.488,321.392 344.604,321.392 344.019,320.806 344.019,307.747 343.433,307.161 340.793,307.161 339.802,306.171 339.802,299.871 ; v1(364.654,326.16) 367.59,326.16 369.114,327.684 452.414,327.684 453,327.099 R46.2@453,323
10: R28.1 U1.10 | length 9.2
  Bottom Layer w1: U1.10@332.919,302.411 336.956,302.411 337.542,302.997 R28.1@337.542,307.339
24: C27.1 C29.1 IC3.3 JP1.7 | length 138.5
  Top Layer w0.6: v1(359.309,259.155) v1(359.309,264.413) ; v1(381.052,197.719) v1(381.052,210.311)
  Bottom Layer w1: JP1.7@350.267,266.775 358.724,266.775 359.309,266.189 v1(359.309,264.413) ; v1(359.309,259.155) 359.309,214.908 363.907,210.311 v1(381.052,210.311) ; v1(381.052,197.719) 395.98,197.719 403.148,190.552 C27.1@407.208,190.552 ; C27.1@407.221,190.539 412.276,190.539 C29.1@412.288,190.552 412.295,190.558 419.737,190.558 IC3.3@419.743,190.564
+12V: C21.1 C22.1 IC1.3 JP1.9 JP1.11 Q1.2 Q2.2 R4.2 R5.2 R29.2 R51.2 U1.4 U2.4 U3.4 U4.4 U5.4 U6.4 U7.4 U8.4 VR7.1 | length 743.9
  Top Layer w1: v1(281.458,229.285) v1(286.564,229.285) ; v1(302.032,288.391) v1(307.29,288.391) ; v1(334.614,195.448) 334.616,195.45 343.229,195.45 v1(343.231,195.452) ; v1(355.296,296.442) v1(366.677,296.442) ; v1(355.855,259.308) 355.88,259.333 v1(355.88,271.754) ; v1(355.914,230.309) v1(365.679,230.309) ; v1(358.319,276.656) v1(363.526,276.656) ; v1(370.739,293.547) v1(379.604,293.547) ; v1(433.046,220.725) v1(433.046,225.373) ; v1(439.802,313.841) v1(445.771,313.841) ; v1(446.865,262.252) v1(451.815,262.252)
  Bottom Layer w1: v1(281.458,229.285) 281.458,202.032 282.044,201.446 320.602,201.446 321.188,200.861 C22.1@321.188,188.718 ; v1(286.564,229.285) 290.23,229.285 291.221,228.294 R4.2@295.098,228.294 U2.4@298.121,228.294 ; U3.4@298.019,264.794 300.354,264.794 300.94,265.38 300.94,275.537 300.024,276.453 R5.2@297.206,276.453 297.206,287.856 297.792,288.441 301.982,288.441 v1(302.032,288.391) ; v1(307.29,288.391) 315.95,288.391 316.536,288.976 316.536,290.416 318.212,292.092 318.212,296.696 314.217,300.692 314.217,303.877 315.142,304.803 317.098,304.803 R29.2@317.247,304.951 U1.4@325.299,304.951 325.399,304.851 326.718,304.851 327.542,304.028 327.542,296.317 328.814,295.045 352.018,295.045 352.604,295.631 352.604,296.442 ; IC1.3@315.32,188.718 C22.1@321.188,188.718 ; v1(334.614,195.448) 326.853,195.448 326.268,194.863 C21.1@326.268,188.718 C22.1@321.188,188.718 ; v1(343.231,195.452) 349.048,195.452 355.88,202.285 355.88,209.524 ; Q2.2@343.561,302.437 343.574,302.449 347.41,302.449 Q1.2@347.422,302.462 352.782,302.462 ; JP1.9@350.267,271.855 357.809,271.855 358.395,272.441 358.395,276.349 357.809,276.935 JP1.11@350.267,276.935 ; v1(355.296,296.442) 352.604,296.442 ; VR7.1@355.753,304.799 355.753,303.048 355.168,302.462 352.782,302.462 ; v1(355.855,259.308) 355.88,259.282 355.88,209.524 ; v1(363.526,276.656) 367.283,276.656 367.895,277.267 367.895,292.961 368.48,293.547 ; v1(365.679,230.309) 377.004,230.309 377.59,230.894 377.59,237.53 378.209,238.149 R51.2@379.579,238.149 379.789,238.149 380.836,237.102 387.247,237.102 389.942,234.408 U4.4@389.942,232.028 ; v1(366.677,296.442) 368.48,294.639 368.48,293.547 ; v1(370.739,293.547) 368.48,293.547 ; v1(379.604,293.547) 388.061,293.547 388.646,292.961 U5.4@388.646,289.711 ; U7.4@425.324,300.202 425.324,307.695 426.332,308.703 428.821,308.703 433.96,313.841 v1(439.802,313.841) ; v1(433.046,220.725) 433.046,206.831 431.141,204.926 366.218,204.926 361.621,209.524 355.88,209.524 ; v1(433.046,225.373) 433.046,231.291 432.411,231.926 424.284,231.926 423.444,232.766 U6.4@423.444,235.938 423.444,248.748 428.558,253.861 428.558,259.112 431.698,262.252 U8.4@433.935,262.252 v1(446.865,262.252) ; v1(445.771,313.841) 445.793,313.864 450.331,313.864 455.524,308.67 455.524,262.838 454.939,262.252 v1(451.815,262.252) ; 352.604,296.442 352.604,302.284 352.782,302.462
-12V: C23.2 C25.2 IC2.2 R35.1 R36.1 R67.1 R76.2 R81.2 U1.11 U2.11 U3.11 U4.11 U5.11 U6.11 U7.11 U8.11 | length 698.5
  Top Layer w1: v1(332.182,239.165) v1(336.983,239.165) ; v1(335.942,251.764) 335.942,252.33 335.992,252.38 v1(335.992,259.13) ; v1(338.38,200.811) v1(338.38,209.244) ; v1(350.292,200.811) 350.3,200.804 358.663,200.804 v1(358.671,200.796) ; v1(353.01,323.392) 353.048,323.354 364.605,323.354 v1(364.669,323.417) ; v1(397.359,313.359) v1(403.378,313.359) ; v1(403.404,239.699) v1@407.798,239.699 ; v1@408.086,262.253 v1@412.749,262.253 ; v1(411.024,200.659) v1(411.024,207.39)
  Bottom Layer w1: U3.11@305.639,264.794 303.863,264.794 303.277,265.38 303.277,274.192 303.549,274.464 307.825,274.464 308.181,274.108 324.453,274.108 325.429,275.085 327.258,275.085 R36.1@327.407,275.233 335.025,275.233 335.992,274.267 v1(335.992,259.13) ; U2.11@305.741,228.294 R35.1@311.888,228.294 317.704,228.294 319.177,229.767 319.177,238.58 319.763,239.165 v1(332.182,239.165) ; IC2.2@315.32,178.127 C23.2@321.188,178.127 C25.2@326.268,178.127 336.65,178.127 338.38,179.856 v1(338.38,200.811) v1(350.292,200.811) ; U1.11@332.919,304.951 333.019,305.052 335.026,305.052 335.445,305.471 335.445,308.265 336.508,309.328 340.414,309.328 341,309.914 341,322.38 342.012,323.392 v1(353.01,323.392) ; v1(335.942,251.764) 338.225,251.764 339.002,250.987 339.002,239.165 ; v1(336.983,239.165) 339.002,239.165 ; v1@338.583,209.143 340.894,209.143 341.809,210.057 341.809,238.378 341.021,239.165 339.002,239.165 ; v1(358.671,200.796) 358.686,200.811 410.871,200.811 v1(411.024,200.659) 411.049,200.684 434.417,200.684 R81.2@434.443,200.71 ; v1(364.669,323.417) 402.312,323.417 403.378,322.35 v1(403.378,313.359) 403.531,313.206 406.171,313.206 406.757,312.62 406.757,297.084 406.736,297.064 406.736,295.364 406.757,295.343 406.757,283.666 412.749,277.673 v1(412.749,262.252) 429.435,262.252 430.226,263.044 430.226,274.573 426.924,277.875 426.924,281.023 427.662,281.761 435.992,281.761 436.602,282.371 436.602,287.906 436.016,288.492 426.238,288.492 425.324,289.407 U7.11@425.324,292.582 ; U5.11@388.646,297.331 388.646,299.389 385.667,302.368 385.667,306.061 386.924,307.319 390.403,307.319 391.059,307.976 391.059,310.971 393.904,313.816 ; R67.1@389.942,242.62 U4.11@389.942,239.648 389.942,237.005 391.142,235.805 402.769,235.805 403.404,236.44 v1(403.404,239.699) ; R76.2@393.904,318.845 393.904,313.816 ; v1(397.359,313.359) 394.361,313.359 393.904,313.816 ; v1(408.085,262.254) 408.085,239.808 v1(408.027,239.75) 408.027,207.976 408.612,207.39 422.655,207.39 423.444,208.179 U6.11@423.444,228.318
A1: C5.1 D9.1 JP2.1 R37.2 U2.8 VR9.1 VR9.2 | length 125.5
  Bottom Layer w1: U2.8@305.741,220.674 VR9.2@310.872,220.674 310.872,219.633 ; C5.1@332.258,221.03 R37.2@326.518,221.03 326.503,221.014 323.414,221.014 D9.1@323.398,220.999 323.398,220.729 322.898,220.229 322.898,220.219 322.313,219.633 310.872,219.633 ; JP2.1@342.139,251.51 343.409,250.24 343.409,207.188 342.823,206.603 307.341,206.603 306.706,207.238 306.706,210.006 308.332,211.632 VR9.1@308.332,215.594 310.108,215.594 310.872,216.358 310.872,219.633
A2: C6.1 D10.1 JP2.3 R38.2 U3.8 VR10.1 VR10.2 | length 65.7
  Bottom Layer w1: U3.8@305.639,257.174 305.739,257.074 314.555,257.074 ; C6.1@314.555,254.202 314.555,257.512 ; R38.2@324.969,261.949 324.969,258.098 ; D10.1@325.997,267.524 317.107,267.524 VR10.2@317.095,267.537 315.14,267.537 314.555,266.951 VR10.1@314.555,262.457 314.555,257.512 ; JP2.3@342.139,256.59 326.477,256.59 324.969,258.098 ; 314.555,257.512 324.383,257.512 324.969,258.098
A3: C12.1 D13.1 JP2.5 R68.2 U4.8 VR18.1 VR18.2 | length 126.2
  Top Layer w0.6: v1(347.651,267.486) 347.702,267.436 v1(347.702,261.594) ; v1(358.243,283.082) 358.255,283.069 369.965,283.069 v1(369.977,283.057) ; v1(377.928,275.445) 377.948,275.424 377.948,266.416 v1(377.969,266.395) v1(388.316,266.394)
  Bottom Layer w1: JP2.5@342.139,261.67 342.177,261.632 347.664,261.632 v1(347.702,261.594) ; v1(347.651,267.486) 347.651,282.496 348.237,283.082 v1(358.243,283.082) ; v1(369.977,283.057) 370.003,283.082 376.962,283.082 377.928,282.117 v1(377.928,275.445) ; v1(388.316,266.394) D13.1@388.316,268.426 394.554,268.426 395.606,267.374 C12.1@395.606,258.927 VR18.1@395.606,253.516 395.642,253.48 395.642,251.562 396.228,250.976 398.603,250.976 ; U4.8@397.562,239.648 397.562,242.169 398.603,243.211 398.603,250.976 ; VR18.2@400.686,250.976 398.603,250.976
A4: D3.2 D4.2 JP2.7 U1.14 VR8.2 VR8.3 | length 158.4
  Top Layer w0.6: v1(338.309,318.129) v1(348.037,318.129)
  Bottom Layer w1: D4.2@290.501,323.087 290.856,322.731 332.219,322.731 332.948,322.003 D3.2@332.948,320.085 337.699,320.085 338.285,319.499 338.285,318.153 v1(338.309,318.129) ; U1.14@332.919,312.571 332.919,314.737 332.2,315.456 332.2,317.104 332.919,317.823 D3.2@332.919,320.085 ; JP2.7@342.139,266.75 339.093,266.75 338.507,267.336 338.507,288.16 339.093,288.746 358.978,288.746 359.563,289.332 359.563,317.701 358.978,318.286 VR8.3@357.506,318.286 357.349,318.129 352.426,318.129 ; v1(348.037,318.129) 352.426,318.129 ; VR8.2@352.426,315.746 352.426,318.129